# Allegro board Placa rutata-detector de cutremur.brd
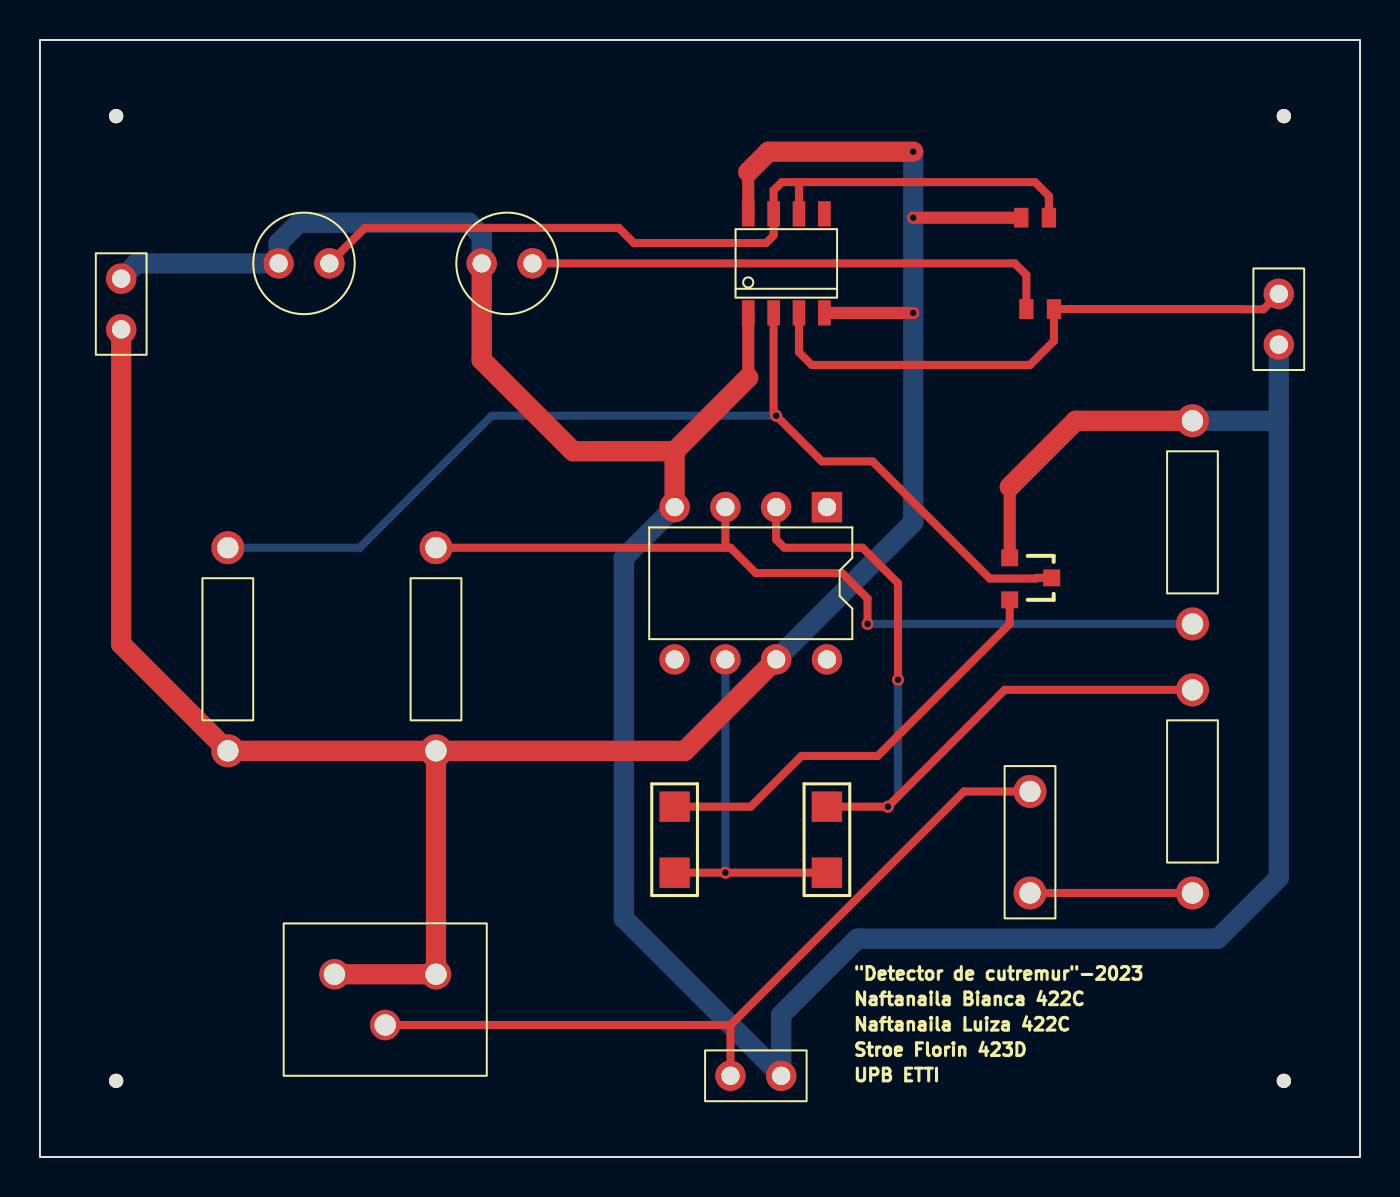
[diagram p0: board, top side]
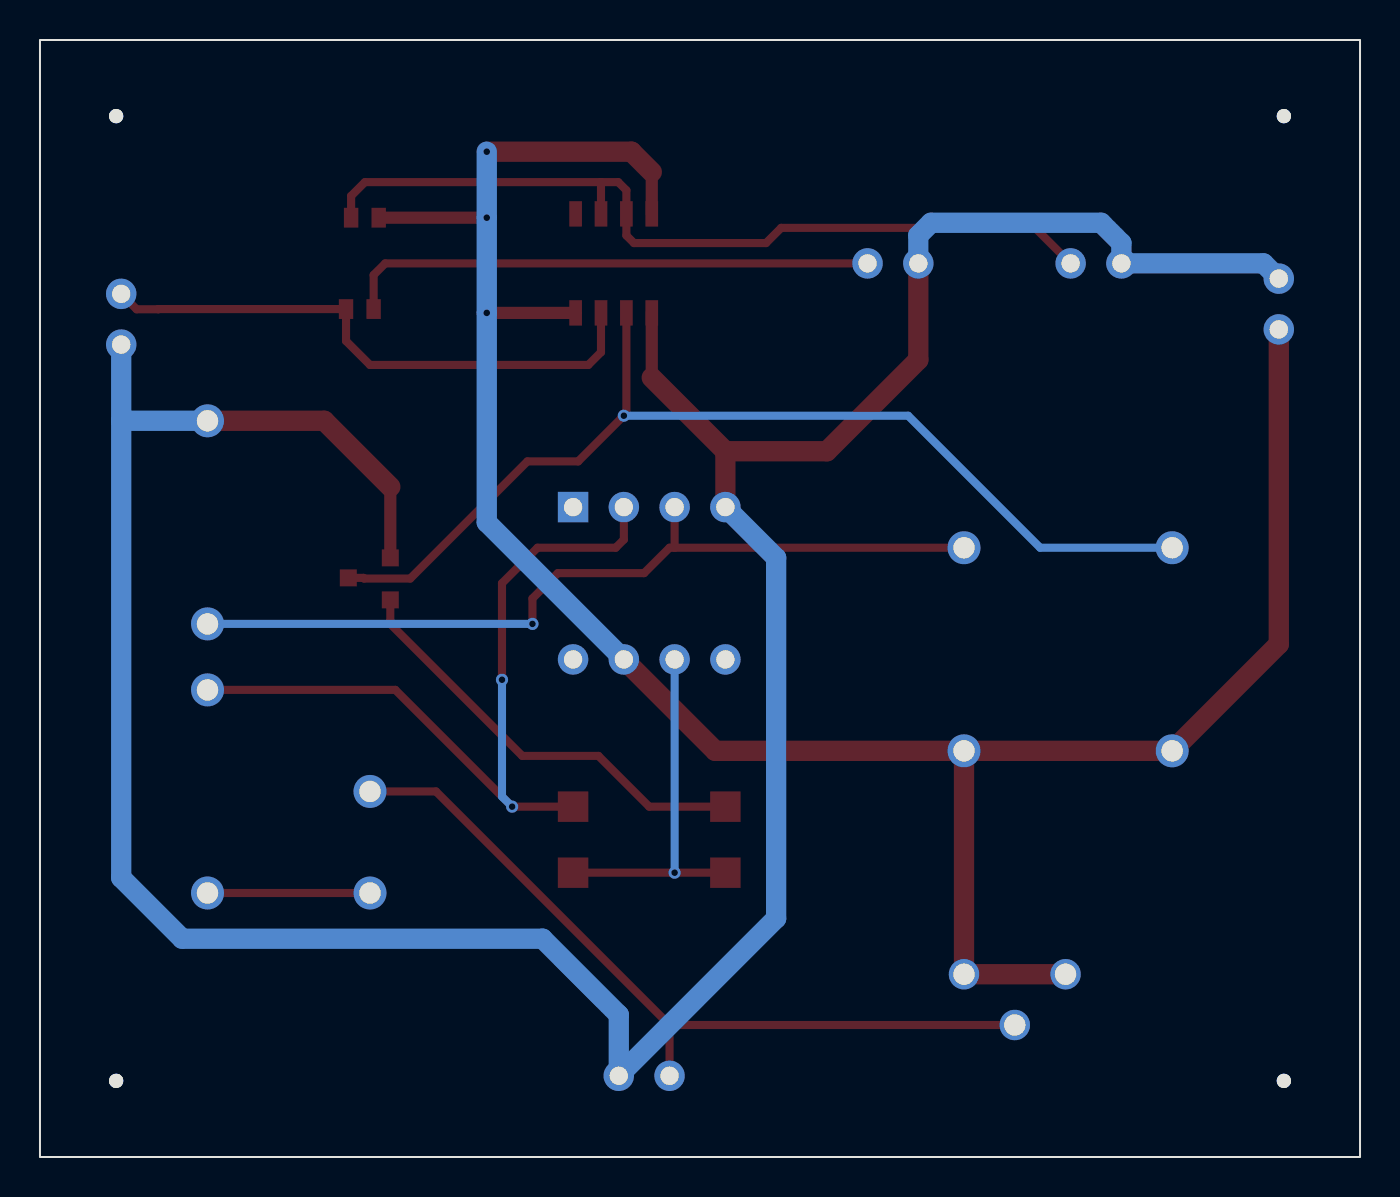
[diagram p1: board, bottom side, seen from below]

Outline 66.04 x 55.88 mm; copper layers: TOP, BOTTOM. Coordinates in mm from the lower left corner of the outline.
Outline path: rectangle 0,0 66.04,55.88

## Design rules (mm)
nets with their own width: min track width 0.406; nets N00855 N00880 N00920 N00981 N01004 N01012 N01016 N01043 N01268 N01306
nets with their own width: min track width 1.016; nets +9V GND

## Placement (name value [footprint] x y rotation side)
C1  220nF  [CAPCK06]  49.53 13.21 0 top
C2  100uF/16V  [CAP196]  14.48 44.7 90 top
D1  LED  [CAP196]  24.64 44.7 90 top
IC2  NE555  [SOIC8]  37.34 44.7 90 top
J1  CON2  [JUMPER2]  4.06 43.94 270 top
NOREF  -  [unnamed]  62.23 3.81 0 top
NOREF#2  -  [unnamed]  3.81 3.81 0 top
NOREF#3  -  [unnamed]  3.81 52.07 0 top
NOREF#4  -  [unnamed]  62.23 52.07 0 top
PZ1  buzzer  [JUMPER2]  61.98 43.18 270 top
R1  12k  [RES400]  57.66 13.21 0 top
R2  12k  [RES400]  19.81 20.32 0 top
R3  4.7k  [RES400]  57.66 26.67 0 top
R4  1M  [SMR1206]  39.37 17.53 270 top
R5  150k  [SMR1206]  31.75 14.22 90 top
R6  1k  [RES400]  9.4 20.32 0 top
R7  100ohm  [RES1608X50N_0603]  50.04 42.42 180 top
R8  100k  [RES1608X50N_0603]  49.78 46.99 0 top
T1  BC548  [SOT23_3]  48.51 29.97 270 top
U2  piezo element  [JUMPER2]  34.54 4.06 0 top
U3  LM741  [DIP8_3]  39.37 32.51 270 top
VR1  10k  [POT]  19.81 9.14 180 top

## Library data of the parts
C1 = CAP NP: Tolerance: ***; User Part Number: ***
C2 = CAP POL: Tolerance: ***; User Part Number: ***
D1 = LED: Tolerance: ***; User Part Number: ***
IC2 = NE555_4: Tolerance: ***; User Part Number: ***
J1 = CON2: User Part Number: ***
PZ1 = PIEZO BUZZER_0: User Part Number: ***
R1-R3 R6 = R: Tolerance: ***; User Part Number: ***
R4 R5 R7 R8 = R
T1 = BC548
U2 = piezo element: User Part Number: ***
U3 = LM741_2: Tolerance: ***; User Part Number: ***
VR1 = POT: User Part Number: ***

## Footprints (pads in the part's own frame, mm; a bottom-side part is the same pattern mirrored in y, then rotated)
CAP196
  round 1.524 hole 0.914: 1(0,0) 2(0,2.54)
CAPCK06
  round 1.651 hole 1.067: 1(0,0) 2(0,5.08)
DIP8_3
  rect 1.524x1.524 hole 0.914: 1(0,0)
  round 1.524 hole 0.914: 2(0,-2.54) 3(0,-5.08) 4(0,-7.62) 5(7.62,-7.62) 6(7.62,-5.08) 7(7.62,-2.54) 8(7.62,0)
JUMPER2
  round 1.524 hole 0.914: 1(0,0) 2(2.54,0)
POT
  round 1.524 hole 1.067: 1(0,0) 2(5.08,0) 3(2.54,2.54)
RES400
  round 1.651 hole 1.067: 1(0,0) 2(0,10.16)
RES1608X50N_0603
  rect 0.72x0.99 smd: 1(-0.69,0) 2(0.69,0)
SMR1206
  rect 1.524x1.524 smd: 1(0,0) 2(3.302,0)
SOIC8
  rect 1.27x0.635 smd: 1(-2.477,1.905) 2(-2.477,0.635) 3(-2.477,-0.635) 4(-2.477,-1.905) 5(2.477,-1.905) 6(2.477,-0.635) 7(2.477,0.635) 8(2.477,1.905)
SOT23_3
  rect 0.85x0.85 smd: 1(0,0) 2(2.1,0) 3(1,2.1)
unnamed
  round 0.711 hole 3.251 unplated: (0,0)

## Nets
+9V: IC2.4 IC2.8(VCC) J1.2 R2.1 R6.1 R8.1 U3.7 VR1.1 VR1.2(WIPER)
GND: C2.2 D1.2(CATHODE) IC2.1 J1.1 PZ1.2(-) R3.2 T1.1(EMITTER) U2.2(PIN2) U3.4(V-)
N00855: R2.2 R3.1 U3.3
N00880: C1.2 U2.1 VR1.3
N00920: C2.1 IC2.6 IC2.7 R8.2
N00981: IC2.2 R6.2 T1.3
N01004: R5.2 T1.2
N01012: R4.2 R5.1 U3.6
N01016: R1.2 R4.1 U3.2
N01043: C1.1 R1.1
N01268: IC2.3 PZ1.1 R7.1
N01306: D1.1 R7.2

Pads without a net: IC2 5; U3 1 5 8

## Via types
v1: diameter 0.61, hole 0.33, TOP to BOTTOM, 8 vias

## Routing (per net, layer and track width the routed paths; a pad name or vN(x,y) marks a point on that pad's centre or on a via; arc(x,y) is an arc through that point)
+9V: length 117.7
  TOP w0.61: R8.1 v1(43.69,46.99) ; 35.43,49.28 IC2.8 ; 39.24,42.23 v1(43.69,42.23)
  TOP w1.016: J1.2 4.06,25.65 R6.1 R2.1 ; R2.1 32.26,20.32 U3.7 ; R2.1 VR1.1 VR1.2 ; 35.43,49.28 36.45,50.29 v1(43.69,50.29)
  BOTTOM w1.016: U3.7 43.69,31.75 v1(43.69,42.23) v1(43.69,46.99) v1(43.69,50.29)
GND: length 157.7
  TOP w0.61: IC2.1 35.43,38.99 ; T1.1 48.51,33.53
  TOP w1.016: 31.75,35.31 U3.4 ; 31.75,35.31 26.67,35.31 22.1,39.88 D1.2 ; 31.75,35.31 35.43,38.99 ; R3.2 51.82,36.83 48.51,33.53
  BOTTOM w1.016: R3.2 61.98,36.83 ; 61.98,36.83 PZ1.2 ; 61.98,36.83 61.98,13.97 58.93,10.92 40.89,10.92 37.08,7.11 U2.2 29.21,11.94 29.21,29.97 U3.4 ; D1.2 22.1,46.1 21.46,46.74 12.95,46.74 11.94,45.72 C2.2 4.83,44.7 J1.1
N00855: length 42.2
  TOP w0.406: 34.29,30.48 U3.3 ; 34.29,30.48 34.54,30.48 35.81,29.21 40.13,29.21 41.4,27.94 v1(41.4,26.67) ; 34.29,30.48 R2.2
  BOTTOM w0.406: v1(41.4,26.67) R3.1
N00880: length 39.6
  TOP w0.406: C1.2 46.23,18.29 34.54,6.6 ; 34.54,6.6 VR1.3 ; 34.54,6.6 U2.1
N00920: length 42.6
  TOP w0.406: 37.97,48.77 37.11,48.77 36.7,48.36 IC2.7 36.7,46.1 36.32,45.72 29.72,45.72 28.96,46.48 16.26,46.48 C2.1 ; 37.97,48.77 IC2.6 ; 37.97,48.77 49.78,48.77 50.47,48.08 R8.2
N00981: length 52.5
  TOP w0.406: T1.3 49.86,28.97 49.82,28.94 47.52,28.94 41.66,34.8 39.12,34.8 v1(36.83,37.08) 36.7,37.21 IC2.2
  BOTTOM w0.406: R6.2 16,30.48 22.61,37.08 v1(36.83,37.08)
N01004: length 21.8
  TOP w0.406: R5.2 35.56,17.53 38.1,20.07 41.91,20.07 48.51,26.67 T1.2
N01012: length 18.3
  TOP w0.406: R4.2 v1(34.29,14.22) R5.1
  BOTTOM w0.406: U3.6 v1(34.29,14.22)
N01016: length 40.7
  TOP w0.406: R1.2 48.26,23.37 v1(42.42,17.53) R4.1 ; v1(42.93,23.88) 42.93,28.7 41.15,30.48 37.24,30.48 36.83,30.89 U3.2
  BOTTOM w0.406: v1(42.93,23.88) 42.93,18.03 v1(42.42,17.53)
N01043: length 8.1
  TOP w0.406: C1.1 R1.1
N01268: length 28.7
  TOP w0.406: PZ1.1 61.2,42.41 60.13,42.41 60.12,42.42 R7.1 50.73,40.82 49.53,39.62 38.61,39.62 37.97,40.26 IC2.3
N01306: length 26.7
  TOP w0.406: R7.2 49.35,44.12 48.77,44.7 D1.1

## Text on the board
Ref Des/Silkscreen Top: "Detector de cutremur"-2023 | Naftanaila Bianca 422C | Naftanaila Luiza 422C | Stroe Florin 423D | UPB ETTI
XSECTION_CHART: *  SURFACE | L1 TOP CONDUCTOR | *  DIELECTRIC | L2 BOTTOM CONDUCTOR | DESIGN CROSS SECTION CHART | ___________________________ | TOTAL THICKNESS 10.4 MIL | 1-2
DISPLAY_TOP: FIGURE | FINISHED_SIZE | 13.0 | 36.0 | 42.0 | 128.0 | DRILL CHART: TOP to BOTTOM | ALL UNITS ARE IN MILS | PLATED | NON-PLATED | QTY | 8 | 18 | 13 | 4 | 43 | TOTAL HOLES:
